# EAGLE board Tugas Day 0_Agung Pratama_13215091  (EAGLE 7.6.0)
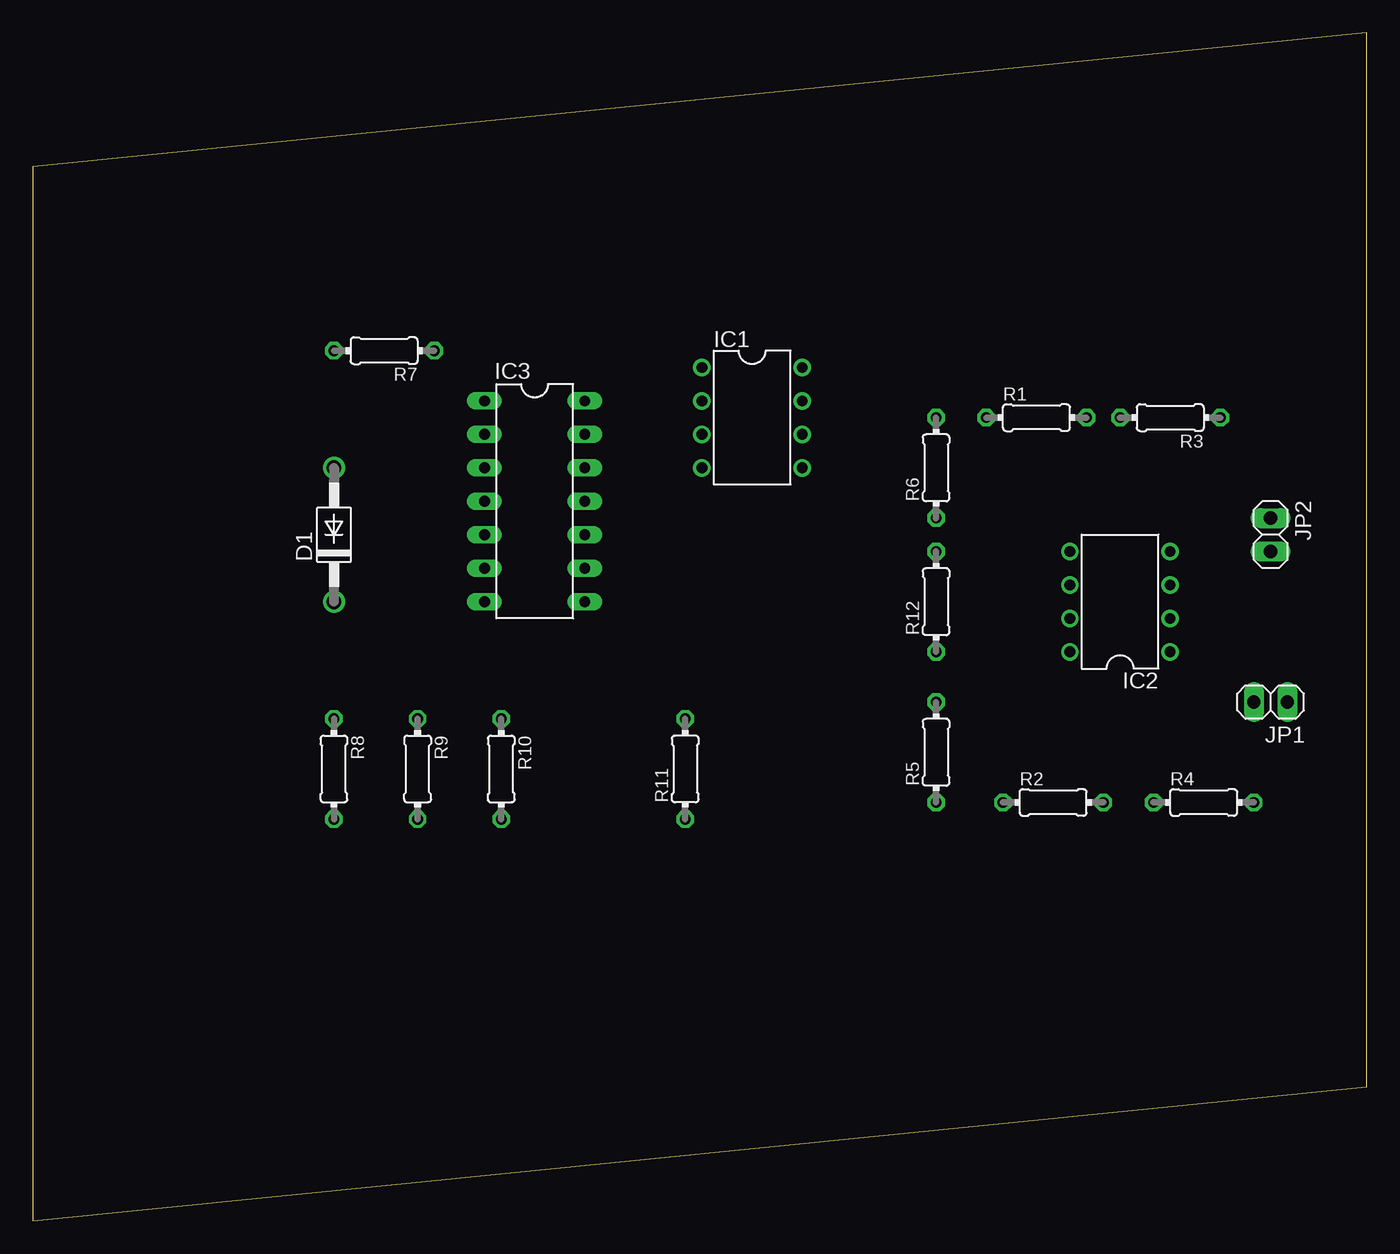
[diagram p0: board, top side]
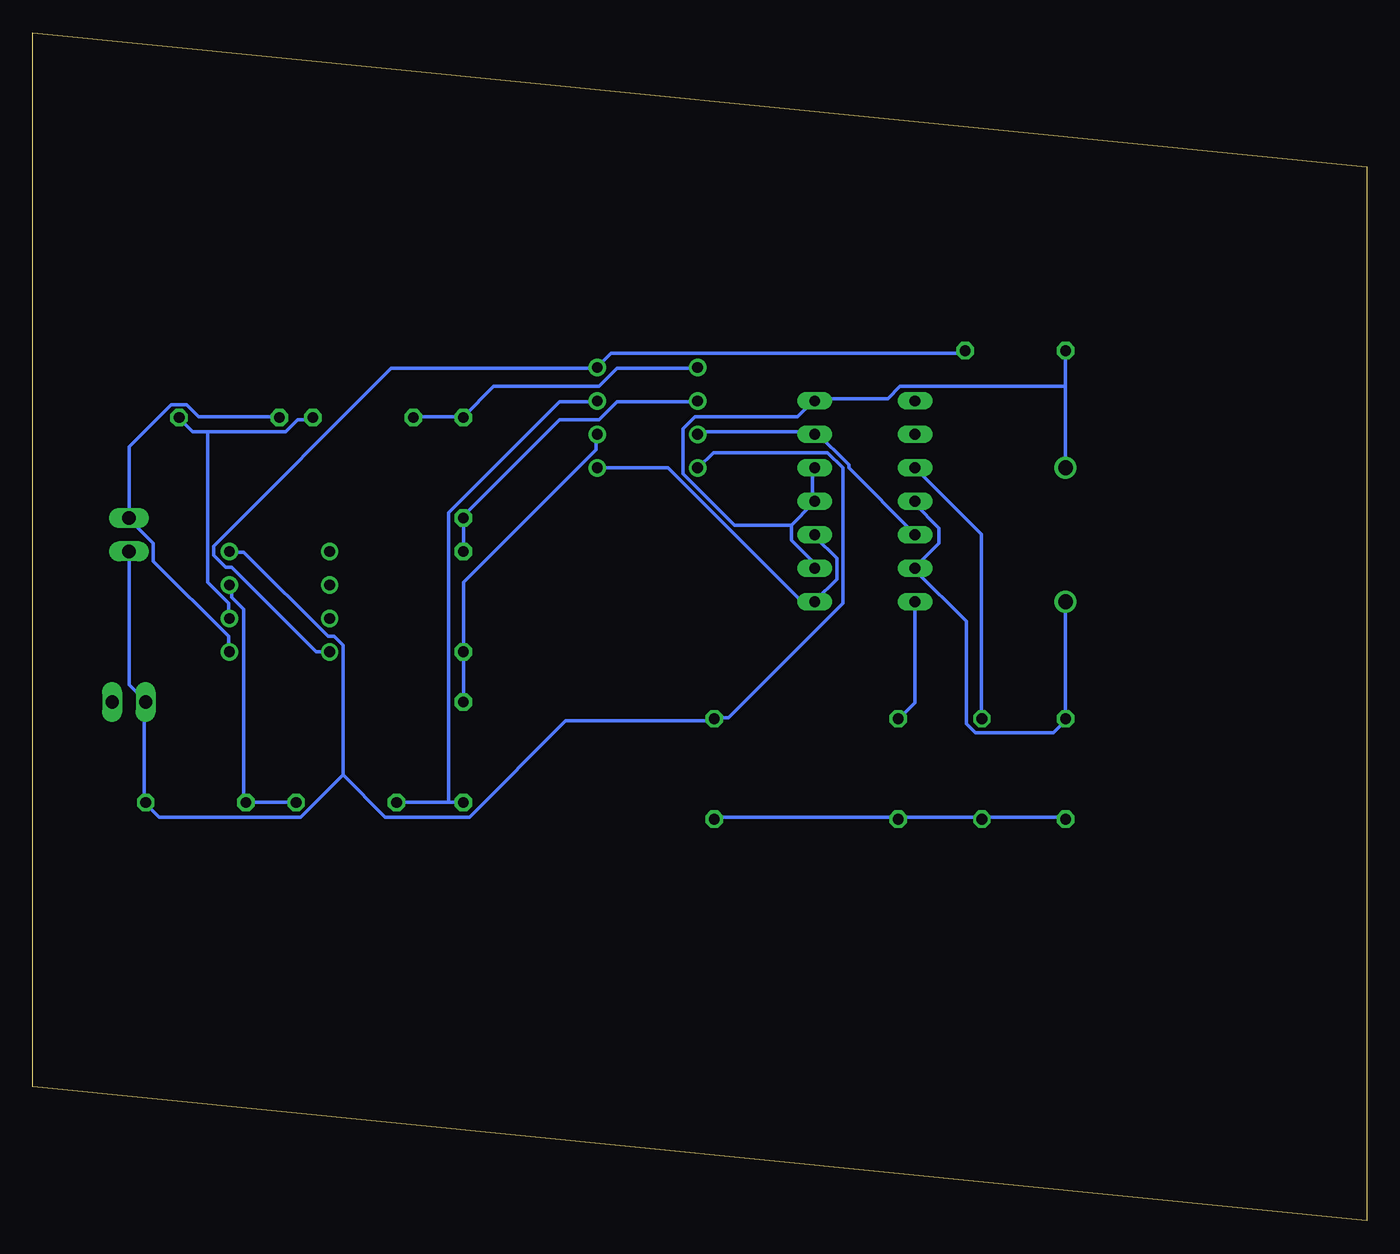
[diagram p1: board, bottom side, seen from below]

Size 101.27 x 90.16 mm. Coordinates in mm from the lower left corner, seen from the top.
Outline: 0,0 101.27,10.16 101.27,90.16 0,80 0,0
Copper layers (1*16): Top 0.035mm / dielectric 1.5mm / Bottom 0.035mm
Design rules "default": minimum track width 10mil, minimum drill 24mil, track to track 8mil, track to pad 8mil, pad to pad 8mil, via to via 8mil, smd to smd 8mil, copper to edge 40mil, drill to drill 8mil, minimum pad ring 10mil, minimum via ring 8mil, stop-mask expansion 4mil, vias tented up to drill 0mil, thermal gap 10mil

## Footprints (pad centres in the part's own frame; a part is rotated, then mirrored left to right if it is on the bottom)
DO41-10 = drill 1.118: A 5.08,0; C -5.08,0
DIL08 = drill 0.813 pad 1.27: 1 -3.81,-3.81; 2 -1.27,-3.81; 3 1.27,-3.81; 4 3.81,-3.81; 5 3.81,3.81; 6 1.27,3.81; 7 -1.27,3.81; 8 -3.81,3.81
DIL14 = drill 0.813 long: 1 -7.62,-3.81; 2 -5.08,-3.81; 3 -2.54,-3.81; 4 0,-3.81; 5 2.54,-3.81; 6 5.08,-3.81; 7 7.62,-3.81; 8 7.62,3.81; 9 5.08,3.81; 10 2.54,3.81; 11 0,3.81; 12 -2.54,3.81; 13 -5.08,3.81; 14 -7.62,3.81
1X02 = drill 1.016 long: 1 -1.27,0; 2 1.27,0
0204/7 = drill 0.813 octagon: 1 -3.81,0; 2 3.81,0

## Placement (x,y rotation side)
D1  1N4004  [DO41-10]  22.86,52.07 90 top
IC1  LM358N  [DIL08]  54.61,60.96 270 top
IC2  LM358N  [DIL08]  82.55,46.99 90 top
IC3  [DIL14]  38.1,54.61 270 top
JP1  [1X02]  93.98,39.37 180 top
JP2  [1X02]  93.98,52.07 270 top
R1  100k  [0204/7]  76.2,60.96 0 top
R2  100k  [0204/7]  77.47,31.75 0 top
R3  100k  [0204/7]  86.36,60.96 180 top
R4  100k  [0204/7]  88.9,31.75 0 top
R5  100k  [0204/7]  68.58,35.56 90 top
R6  100k  [0204/7]  68.58,57.15 90 top
R7  60k  [0204/7]  26.67,66.04 180 top
R8  12k  [0204/7]  22.86,34.29 270 top
R9  100k  [0204/7]  29.21,34.29 270 top
R10  200k  [0204/7]  35.56,34.29 270 top
R11  60k  [0204/7]  49.53,34.29 90 top
R12  1k  [0204/7]  68.58,46.99 90 top

## Library data of the parts
D1 = diode
IC1 IC2 = linear
IC3 = ic-package
JP1 JP2 = pinhead
R1-R12 = resistor

## Nets
AGND: IC1.4 IC2.4 JP1.2 JP2.2 R4.2 R11.2
MALE_HEADER1: JP1.1
N$1: R8.2 R9.2 R10.2 R11.1
N$2: IC1.6 R5.2 R12.1
N$3: IC1.2 R6.1 R12.2
N$4: D1.A IC3.9 IC3.11 IC3.12 IC3.14 R7.2
N$5: IC1.3 IC3.5 IC3.13
N$6: D1.C IC3.4 IC3.6 R8.1
N$7: IC3.3 R9.1
N$8: IC1.5 IC3.8 IC3.10
N$9: IC2.3 R2.2 R4.1
N$10: IC1.7 R2.1 R5.1
N$11: IC1.1 R1.1 R6.2
N$12: IC2.2 R1.2 R3.1
N$13: IC3.7 R10.1
VCC: IC1.8 IC2.8 R7.1
VOUT: IC2.1 JP2.1 R3.2

## Tracks (layer width: path | path; a pad name or v marks a point on that pad's centre or on a via)
AGND
  Bottom 0.254: IC1.4 50.75,57.15 49.61,58.29 40.92,58.29 39.78,57.15 39.78,46.86 48.46,38.18 49.38,38.18 R11.2 49.61,37.95 60.81,37.95 68.12,30.63 74.52,30.63 77.72,33.83 | 77.72,33.83 77.72,43.66 78.41,44.35 78.87,44.35 85.27,50.75 86.18,50.75 IC2.4 | 77.72,33.83 80.92,30.63 91.67,30.63 92.58,31.55 R4.2 92.81,31.77 92.81,39.32 JP1.2 92.81,39.55 93.95,40.69 93.95,50.75 JP2.2
N$1
  Bottom 0.254: R8.2 22.86,30.63 29.03,30.63 R9.2 29.26,30.63 35.43,30.63 R10.2 35.66,30.63 49.38,30.63 R11.1
N$2
  Bottom 0.254: R5.2 R12.1 68.58,48.46 58.52,58.52 58.52,59.66 IC1.6
N$3
  Bottom 0.254: R12.2 R6.1 68.58,53.49 61.27,60.81 58.29,60.81 56.92,62.18 50.98,62.18 IC1.2
N$4
  Bottom 0.254: 43.66,52.81 43.66,51.66 42.06,50.06 42.06,49.61 IC3.9 | 43.66,52.81 42.06,54.41 IC3.11 42.06,54.63 42.06,57.15 IC3.12 | D1.A 22.86,63.32 | 22.86,63.32 R7.2 | 22.86,63.32 35.43,63.32 36.35,62.41 41.83,62.41 IC3.14 42.06,62.18 43.2,61.04 50.98,61.04 51.89,60.12 51.89,56.69 48.01,52.81 43.66,52.81
N$5
  Bottom 0.254: IC3.5 34.29,52.12 39.32,57.15 39.32,57.38 41.83,59.89 IC3.13 42.06,59.89 50.75,59.89 IC1.3
N$6
  Bottom 0.254: IC3.4 34.29,54.41 32.46,52.58 32.46,51.44 34.29,49.61 IC3.6 34.29,49.38 30.4,45.49 30.4,37.72 29.72,37.03 23.77,37.03 22.86,37.95 R8.1 D1.C
N$7
  Bottom 0.254: IC3.3 29.26,52.12 29.26,38.18 R9.1
N$8
  Bottom 0.254: IC3.10 41.83,51.89 40.23,50.29 40.23,48.69 41.83,47.09 IC3.8 42.06,47.09 42.98,47.09 53.03,57.15 IC1.5
N$9
  Bottom 0.254: R2.2 81.38,31.77 85.04,31.77 R4.1 85.27,31.77 85.27,46.41 86.18,47.32 86.18,48.23 IC2.3
N$10
  Bottom 0.254: 69.72,31.77 73.61,31.77 R2.1 | 69.72,31.77 68.58,31.77 R5.1 | 69.72,31.77 69.72,53.72 61.27,62.18 58.52,62.18 IC1.7
N$11
  Bottom 0.254: 68.58,61.04 72.24,61.04 R1.1 | 68.58,61.04 66.29,63.32 58.29,63.32 56.92,64.69 50.98,64.69 IC1.1 | 68.58,61.04 R6.2
N$12
  Bottom 0.254: 88.01,59.89 89.15,59.89 90.07,60.81 R3.1 | 88.01,59.89 82.07,59.89 81.15,60.81 80.01,60.81 R1.2 | 88.01,59.89 88.01,48.46 86.41,46.86 86.41,45.72 IC2.2
N$13
  Bottom 0.254: IC3.7 34.29,39.32 35.43,38.18 R10.1
VCC
  Bottom 0.254: IC2.8 78.87,43.2 79.78,43.2 86.18,49.61 86.64,49.61 87.55,50.52 87.55,51.21 74.07,64.69 58.52,64.69 IC1.8 58.29,64.92 57.38,65.84 30.63,65.84 R7.1
VOUT
  Bottom 0.254: R3.2 82.75,61.04 88.7,61.04 89.61,61.95 90.75,61.95 93.95,58.75 93.95,53.49 JP2.1 93.95,53.26 92.13,51.44 92.13,50.06 86.41,44.35 86.41,43.2 IC2.1